# EAGLE board Driver Brd (EAGLE 7.3.0)
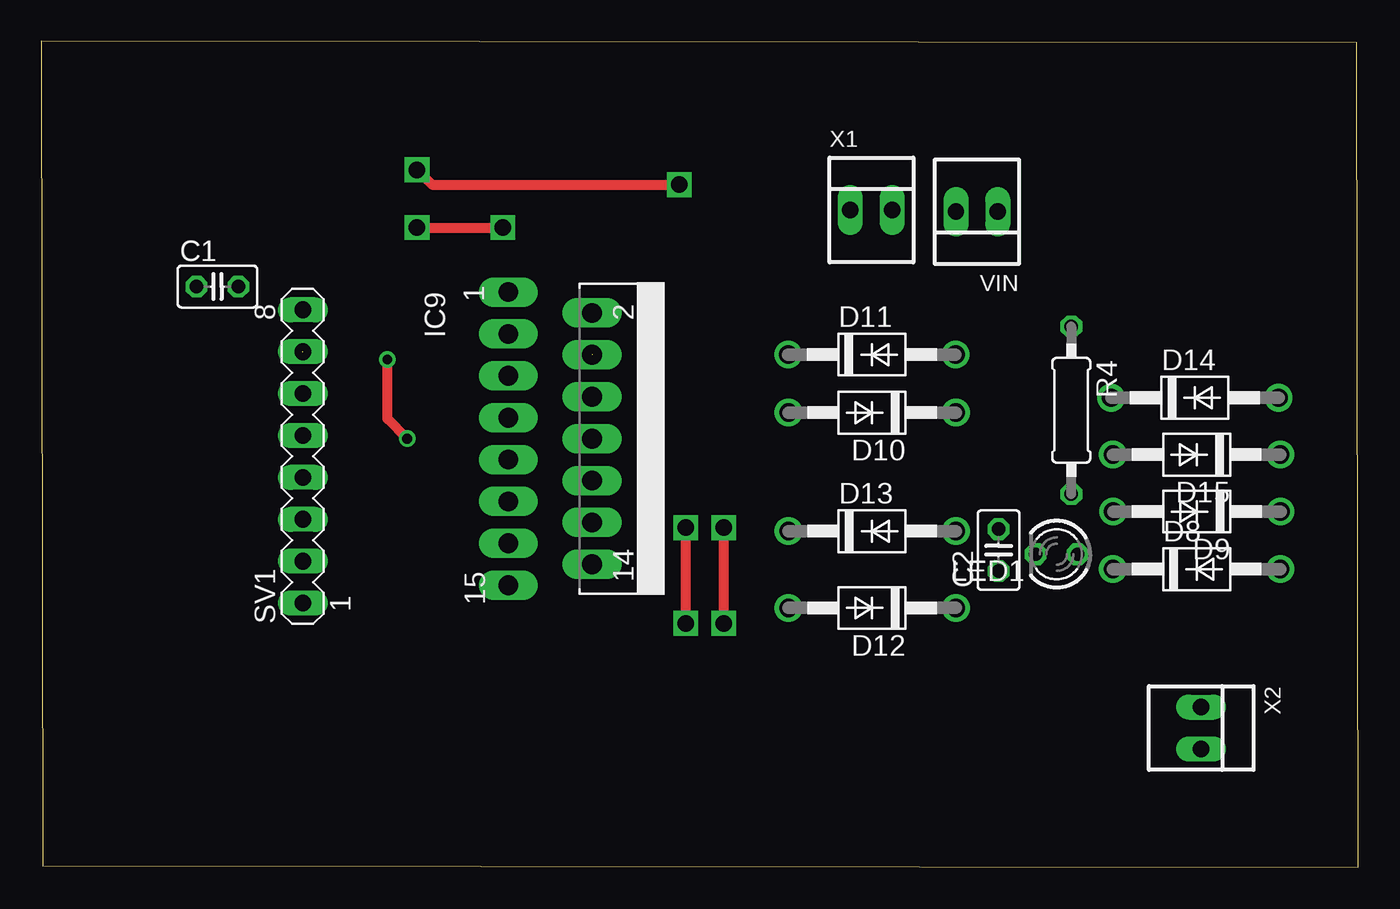
[diagram p0: board, top side]
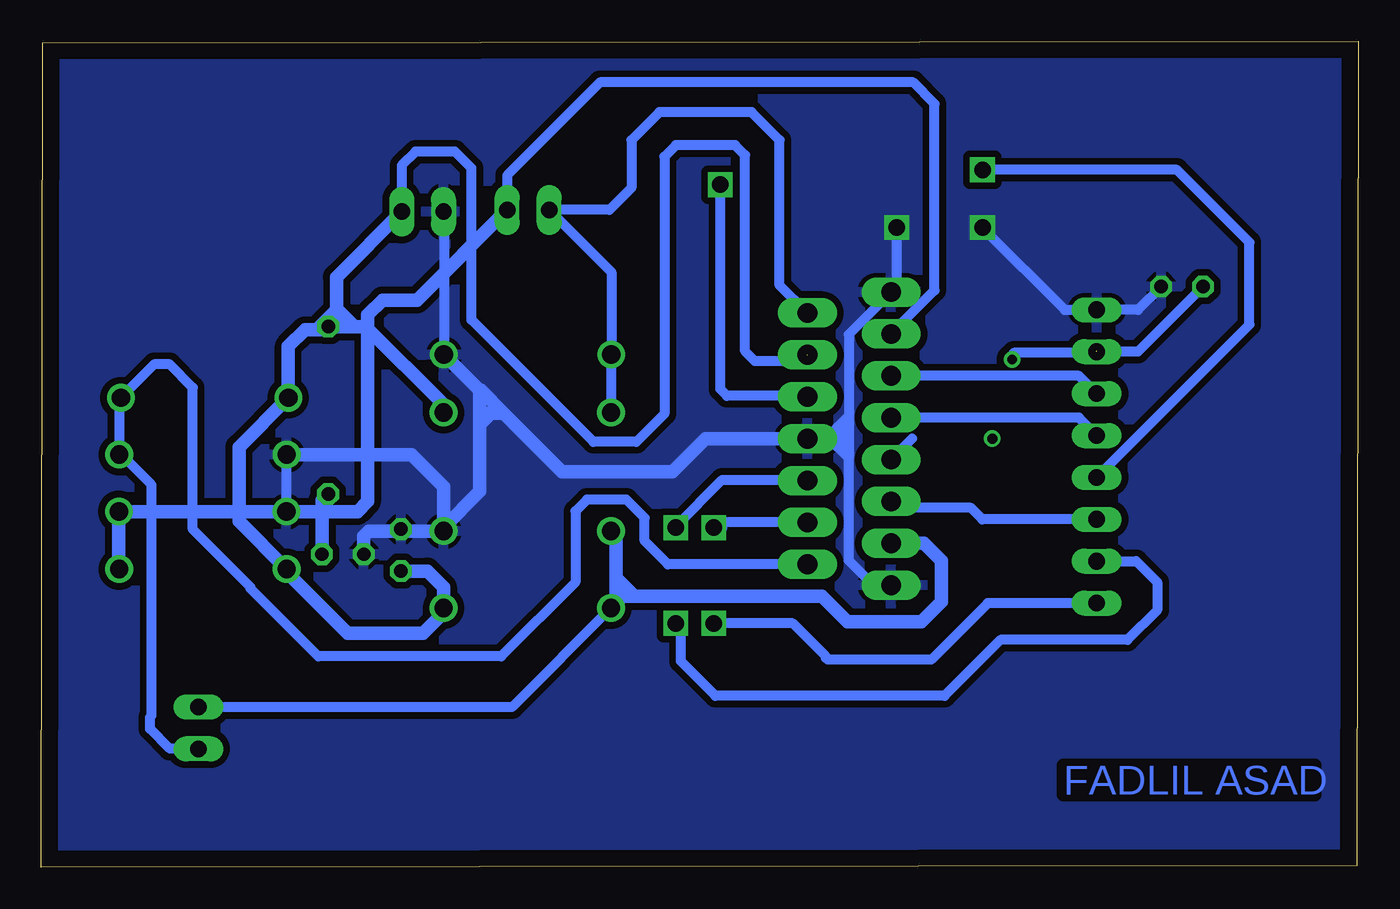
[diagram p1: board, bottom side, seen from below]

Size 79.9 x 50.1 mm. Coordinates in mm from the lower left corner, seen from the top.
Outline: 0.1,0.1 79.9,0 79.8,50 0,50.1 0.1,0.1
Copper layers (1*16): Top 0.035mm / dielectric 1.5mm / Bottom 0.035mm
Design rules "default": minimum track width 6mil, minimum drill 0.35mm, track to track 6mil, track to pad 6mil, pad to pad 6mil, via to via 6mil, smd to smd 6mil, copper to edge 40mil, drill to drill 6mil, minimum pad ring 10mil, minimum via ring 8mil, stop-mask expansion 4mil, vias tented up to drill 0mil, thermal gap 10mil

## Footprints (pad centres in the part's own frame; a part is rotated, then mirrored left to right if it is on the bottom)
C025-025X050 = drill 0.813 octagon: 1 -1.27,0; 2 1.27,0
DO41-10 = drill 1.118: A 5.08,0; C -5.08,0
MULTIWATT-15 = drill 1.2 long: 1 -8.89,-7.62; 2 -7.62,-2.54; 3 -6.35,-7.62; 4 -5.08,-2.54; 5 -3.81,-7.62; 6 -2.54,-2.54; 7 -1.27,-7.62; 8 0,-2.54; 9 1.27,-7.62; 10 2.54,-2.54; 11 3.81,-7.62; 12 5.08,-2.54; 13 6.35,-7.62; 14 7.62,-2.54; 15 8.89,-7.62
LED3MM = drill 0.813 octagon: A -1.27,0; K 1.27,0
0207/10 = drill 0.813 octagon: 1 -5.08,0; 2 5.08,0
MA08-1 = drill 1.016 long: 1 -8.89,0; 2 -6.35,0; 3 -3.81,0; 4 -1.27,0; 5 1.27,0; 6 3.81,0; 7 6.35,0; 8 8.89,0
22-23-2021 = drill 1 long: 1 -1.27,0; 2 1.27,0

## Placement (x,y rotation side)
C1  100nF  [C025-025X050]  10.69,35.22 0 top
C2  100nF  [C025-025X050]  58.08,19.24 90 top
D8  1N4004  [DO41-10]  70.09,18.09 0 top
D9  1N4004  [DO41-10]  70.11,21.58 180 top
D10  1N4004  [DO41-10]  50.41,27.58 180 top
D11  1N4004  [DO41-10]  50.39,31.1 0 top
D12  1N4004  [DO41-10]  50.41,15.73 180 top
D13  1N4004  [DO41-10]  50.41,20.39 0 top
D14  1N4004  [DO41-10]  69.99,28.48 0 top
D15  1N4004  [DO41-10]  70.09,25.03 180 top
IC9  L298  [MULTIWATT-15]  35.96,26 270 top
LED1  [LED3MM]  61.6,18.99 180 top
R4  330  [0207/10]  62.49,27.72 270 top
SV1  [MA08-1]  15.87,24.92 90 top
VIN  22-23-2021  [22-23-2021]  56.76,39.76 180 top
X1  22-23-2021  [22-23-2021]  50.36,39.87 0 top
X2  22-23-2021  [22-23-2021]  70.37,8.45 270 top

## Library data of the parts
C1 C2 R4 = rcl
D8-D15 = diode
IC9 = st-microelectronics
LED1 = led
SV1 = con-lstb; OC_FARNELL: unknown; OC_NEWARK: unknown
VIN X1 X2 = con-molex; MF: MOLEX; MPN: 22-23-2021; OC_FARNELL: 1462926; OC_NEWARK: 25C3832

## Nets
GND: C1.2 C2.2 D9.A D11.A D13.A D15.A IC9.1 IC9.8 IC9.15 LED1.K SV1.8 VIN.2
N$1: IC9.5 SV1.6
N$3: IC9.7 SV1.5
N$5: IC9.12 SV1.1
N$8: IC9.10 SV1.2
N$16: IC9.6 SV1.4
N$17: IC9.11 SV1.3
N$44: LED1.A R4.2
N$204: D8.A D9.C IC9.3 X1.2
N$205: D10.A D11.C IC9.2 X1.1
N$206: D12.A D13.C IC9.13 X2.1
N$207: D14.A D15.C IC9.14 X2.2
S$1: IC9.9
VCC: C1.1 SV1.7
VDD: C2.1 D8.C D10.C D12.C D14.C IC9.4 R4.1 VIN.1

## Tracks (layer width: path | path; a pad name or v marks a point on that pad's centre or on a via)
GND  (via drill 1)
  Top 0.61: v22.8,38.8 v28,38.8
  Bottom 0.61: IC9.15 29.41,17.11 30.9,18.6 30.9,24.8 | 30.9,24.8 31.55,25.45 | 31.55,25.45 32.1,26 32.3,26 | 30.9,27.4 30.9,26.7 | 30.9,26.7 30.9,26.1 | 30.9,26.1 30.9,24.8 | 30.9,27.4 31.6,26.7 | 31.6,26.7 32.2,26.1 | 32.3,26 IC9.8 | 30.9,26.1 32.2,26.1 | 32.2,26.1 32.3,26 | 30.9,26.7 31.6,26.7 | 31.55,25.45 30.9,26.1 | v28,38.8 28,35.23 IC9.1 30.9,32.33 30.9,27.4 | v22.8,38.8 17.81,33.81 SV1.8 13.37,33.81 C1.2 | D15.A 65.03,25.01 D9.A | VIN.2 55.47,39.74 D11.A
  Bottom 0.813: LED1.K 60.33,20.09 60.03,20.39 D13.A | D13.A 55.49,23.09 57.43,25.03 D15.A | 65.08,21.58 D9.A | D11.A 53.3,28.93 | 53.3,26.85 53.3,22.8 55.49,20.61 D13.A | 53.3,26.85 53.3,27.4 | 53.3,27.4 53.3,28.93 | 53.3,28.93 53.23,28.93 51.85,27.55 | 51.85,27.55 48.3,24 41.6,24 39.6,26 IC9.8 | 51.85,27.55 52.6,27.55 | 52.6,27.55 53.15,27.55 53.3,27.4 | 52.6,27.55 53.3,26.85 | C2.2 57.96,20.39 D13.A | IC9.15
  pour Bottom (isolate 0.406): 0,49.9 -0.2,49.9 -0.2,-0.1 79.5,-0.1 79.5,49.9 -0.3,49.9 -0.3,49.8
N$1
  Bottom 0.61: SV1.6 16.95,29.81 IC9.5
N$3
  Bottom 0.61: SV1.5 16.95,27.27 IC9.7
N$5  (via drill 1)
  Top 0.61: v39.1,20.6 v39.1,14.8
  Bottom 0.61: SV1.1 22.47,16.03 25.9,12.6 32.2,12.6 32.3,12.7 32.3,12.8 34.3,14.8 v39.1,14.8 | IC9.12 38.78,20.92 v39.1,20.6
  Bottom 0.813: v39.1,14.8 39,14.7 | v39.1,20.6 38.7,20.6 38.68,20.62
N$8  (via drill 1)
  Top 0.61: v41.4,20.6 v41.4,14.8
  Bottom 0.61: v41.4,20.6 41.4,20.7 38.6,23.5 33.46,23.5 IC9.10 | SV1.2 13.47,18.57 12.2,17.3 12.2,15.6 14,13.8 21.7,13.8 25.1,10.4 39,10.4 41.1,12.5 41.1,14.5 v41.4,14.8
N$16  (via drill 1)
  Top 0.61: v22.8,42.3 23.7,41.4 v38.7,41.4
  Bottom 0.61: IC9.6 33.48,28.6 38.3,28.6 38.7,29 v38.7,41.4 | SV1.4 6.6,32.92 6.6,37.9 11,42.3 v22.8,42.3
N$17
  Bottom 0.61: SV1.3 22.81,21.11 23.5,21.8 27.95,21.8 IC9.11
N$44
  Bottom 0.813: R4.2 62.87,22.26 LED1.A
N$204
  Bottom 0.61: 75.21,18.09 D8.A | IC9.3 25.7,34.99 25.7,46.3 27,47.6 46,47.6 51.63,41.97 X1.2
  Bottom 0.813: 75.17,21.56 D9.C | X1.2 57.1,34.4 59.2,34.4 60.1,33.5 60.1,22.2 60.72,21.58 D9.C | D8.A 75.19,18.11 D9.C
N$205
  Bottom 0.61: D11.C 45.33,31.08 | IC9.2 35.1,35.3 35.1,44.1 36.8,45.8 42.4,45.8 44.1,44.1 44.1,41.2 45.43,39.87 X1.1 45.31,36.09 D11.C | 45.31,27.6 D11.C
  Bottom 0.813: 45.31,27.6 D10.A
N$206
  Bottom 0.61: D12.A 51.34,9.72 X2.1
  Bottom 0.813: D13.C 45.03,20.09 45.03,17.56 | 45.03,17.56 45.03,16.03 D12.A 44.63,16.43 43.9,16.43 | IC9.13 26.35,19.65 25.3,18.6 25.3,16.1 26.5,14.9 31,14.9 32.53,16.43 43.9,16.43 | 43.9,16.43 45.03,17.56
N$207
  Bottom 0.61: X2.2 70.39,7.2 72.1,7.2 73.3,8.4 73.3,9.1 73.2,9.2 73.2,23.2 75.03,25.03 D15.C 75.17,28.38 D14.A 73.05,30.5 72.1,30.5 70.7,29.1 70.7,20.5 67.2,17 67.2,16.9 63.1,12.8 52,12.8 47.5,17.3 47.5,21.6 46.8,22.3 44.4,22.3 43.3,21.2 43.3,19.8 41.88,18.38 IC9.14
  Bottom 0.813: 75.07,25.13 D15.C
S$1
  Bottom 0.61: IC9.9 27.07,26
VCC  (via drill 0.6)  (1 unrouted)
  Top 0.61: v21,30.8 21,27.2 v22.2,26
  Bottom 0.61: 15.9,31.3 16,31.2 20.9,31.2 21,30.9 v21,30.8 | C1.1 13.37,31.27 SV1.7
VDD  (1 unrouted)
  Bottom 0.61: 33.44,31.1 33.84,30.7 36.6,30.7 37.2,31.3 37.2,43.2 37.8,43.8 41.4,43.8 42.1,43.1 42.1,27.5 43.8,25.8 46.4,25.8 53.8,33.2 53.8,42.4 54.8,43.4 57.2,43.4 58.03,42.57 VIN.1
  Bottom 0.813: D10.C 55.49,28.08 60.21,32.8 60.9,32.8 | R4.1 62.71,32.8 62.51,32.6 63.2,32.6 | 63.2,32.6 63.9,32.6 64.91,31.59 D14.C 67.9,25.49 67.9,20.98 D8.C 65.01,17.91 61.3,14.2 56.72,14.2 55.49,15.43 D12.C 55.49,16.99 56.47,17.97 C2.1 | R4.1 60.9,32.8 | R4.1 61.99,33.3 61.99,33.81 | 61.99,33.89 61.99,35.8 VIN.1 58.03,40.93 | 60.9,32.8 61.99,33.89 | 61.99,33.89 61.99,33.81 | 61.99,33.81 63.2,32.6

## Text on the board
Bottom: FADLIL ASAD